# EAGLE board RS232_NPN_PNP (EAGLE 7.7.0)
RS232 Adapter using NPN and PNP Transistors
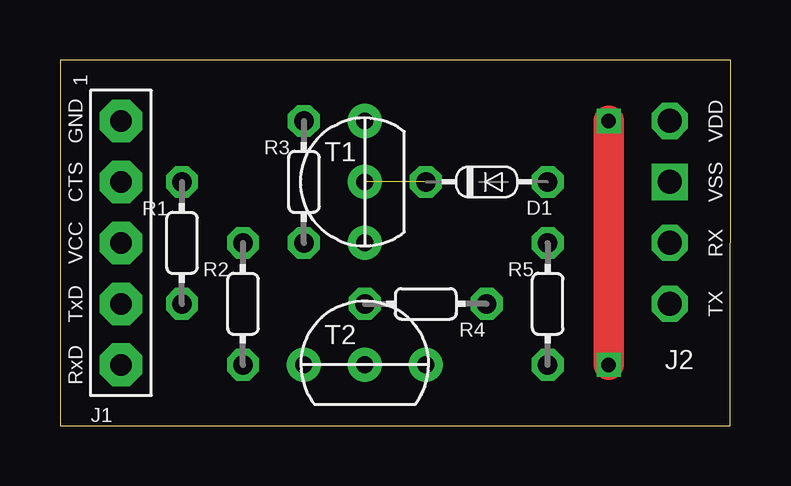
[diagram p0: board, top side]
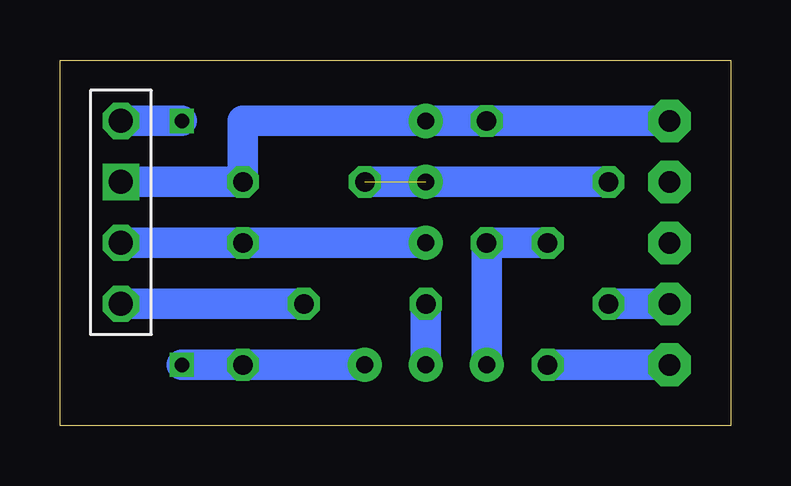
[diagram p1: board, bottom side, seen from below]

Size 27.94 x 15.24 mm. Coordinates in mm from the lower left corner, seen from the top.
Outline: 0,0 27.92,0 27.94,15.24 0,15.24 0,0
Copper layers (1*16): Top 0.035mm / dielectric 1.5mm / Bottom 0.035mm
Design rules "default": minimum track width 10mil, minimum drill 24mil, track to track 8mil, track to pad 8mil, pad to pad 8mil, via to via 8mil, smd to smd 8mil, copper to edge 40mil, drill to drill 8mil, minimum pad ring 10mil, minimum via ring 8mil, stop-mask expansion 4mil, vias tented up to drill 0mil, thermal gap 10mil

## Footprints (pad centres in the part's own frame; a part is rotated, then mirrored left to right if it is on the bottom)
DO34-5 = drill 0.813 octagon: A 2.54,0; C -2.54,0
FTDI232-BO-5-L = drill 0.9 pad 1.778 octagon: CTS 0,2.54; GND 0,5.08; RXD 0,-5.08; TXD 0,-2.54; VCC 0,0
PIC-UART = drill 1 octagon: 17 0,0; 18 0,2.54; 20 0,7.62 | drill 1 square: 19 0,5.08
0202/5-V = drill 0.813 octagon: 1 0,2.54; 2 0,-2.54
0202/5 = drill 0.813 octagon: 1 -2.54,0; 2 2.54,0
TO92-CBE = drill 0.7 pad 1.422: B 0,0; C 0,2.54; E 0,-2.54

## Placement (x,y rotation side)
D1  1N4148  [DO34-5]  17.78,10.16 0 top
J1  FTDI232  [FTDI232-BO-5-L]  2.54,7.62 0 top
J2  PIC-UART  [PIC-UART]  25.4,5.08 0 top
R1  10kΩ  [0202/5-V]  5.08,7.62 0 top
R2  1kΩ  [0202/5-V]  7.62,5.08 0 top
R3  4.7kΩ  [0202/5-V]  10.16,10.16 0 top
R4  10kΩ  [0202/5]  15.24,5.08 180 top
R5  1kΩ  [0202/5-V]  20.32,5.08 0 top
T1  BC547  [TO92-CBE]  12.7,10.16 180 top
T2  BC557  [TO92-CBE]  12.7,2.54 90 top

## Library data of the parts
D1 = d
J1 J2 = pinconn
R1-R5 = r
T1 T2 = t

## Nets
+5V: J2.20 R5.2 T2.E
GND: D1.A J1.GND J2.19 R3.1 T1.E
N$1: J2.18 R5.1 T1.C
N$2: D1.C R1.1 T1.B
N$3: J1.TXD R1.2
N$4: J2.17 R4.1
N$5: R4.2 T2.B
N$6: R2.1 R3.2 T2.C
N$7: J1.RXD R2.2

## Tracks (layer width: path | path; a pad name or v marks a point on that pad's centre or on a via)
+5V  (via drill 0.6)
  Top 1.27: v22.86,12.7 v22.86,2.54
  Bottom 1.27: J2.20 v22.86,12.7 | R5.2 v22.86,2.54 T2.E
GND
  Bottom 1.27: J2.19 D1.A 20.32,12.7 T1.E R3.1 J1.GND
N$1
  Bottom 1.27: J2.18 R5.1 T1.C
N$2  (1 unrouted)
  Bottom 1.27: D1.C R1.1
N$3
  Bottom 1.27: R1.2 J1.TXD
N$4
  Bottom 1.27: R4.1 J2.17 21.59,5.08
N$5
  Bottom 1.27: T2.B R4.2
N$6
  Bottom 1.27: T2.C R3.2 R2.1
N$7
  Bottom 1.27: J1.RXD R2.2